# Altium PCB 主板-加霍尔.PcbDoc (part 1 of 4)
Units mm, origin at the board's own origin, x right, y up, seen from the top; angles counter-clockwise.
Board outline 97.69 x 103.45 mm, 2 copper layers (Top Layer, Bottom Layer); 80 components, 81 nets, 260 pads, 281 vias.
Unrouted connection lines stored in the file: 12.
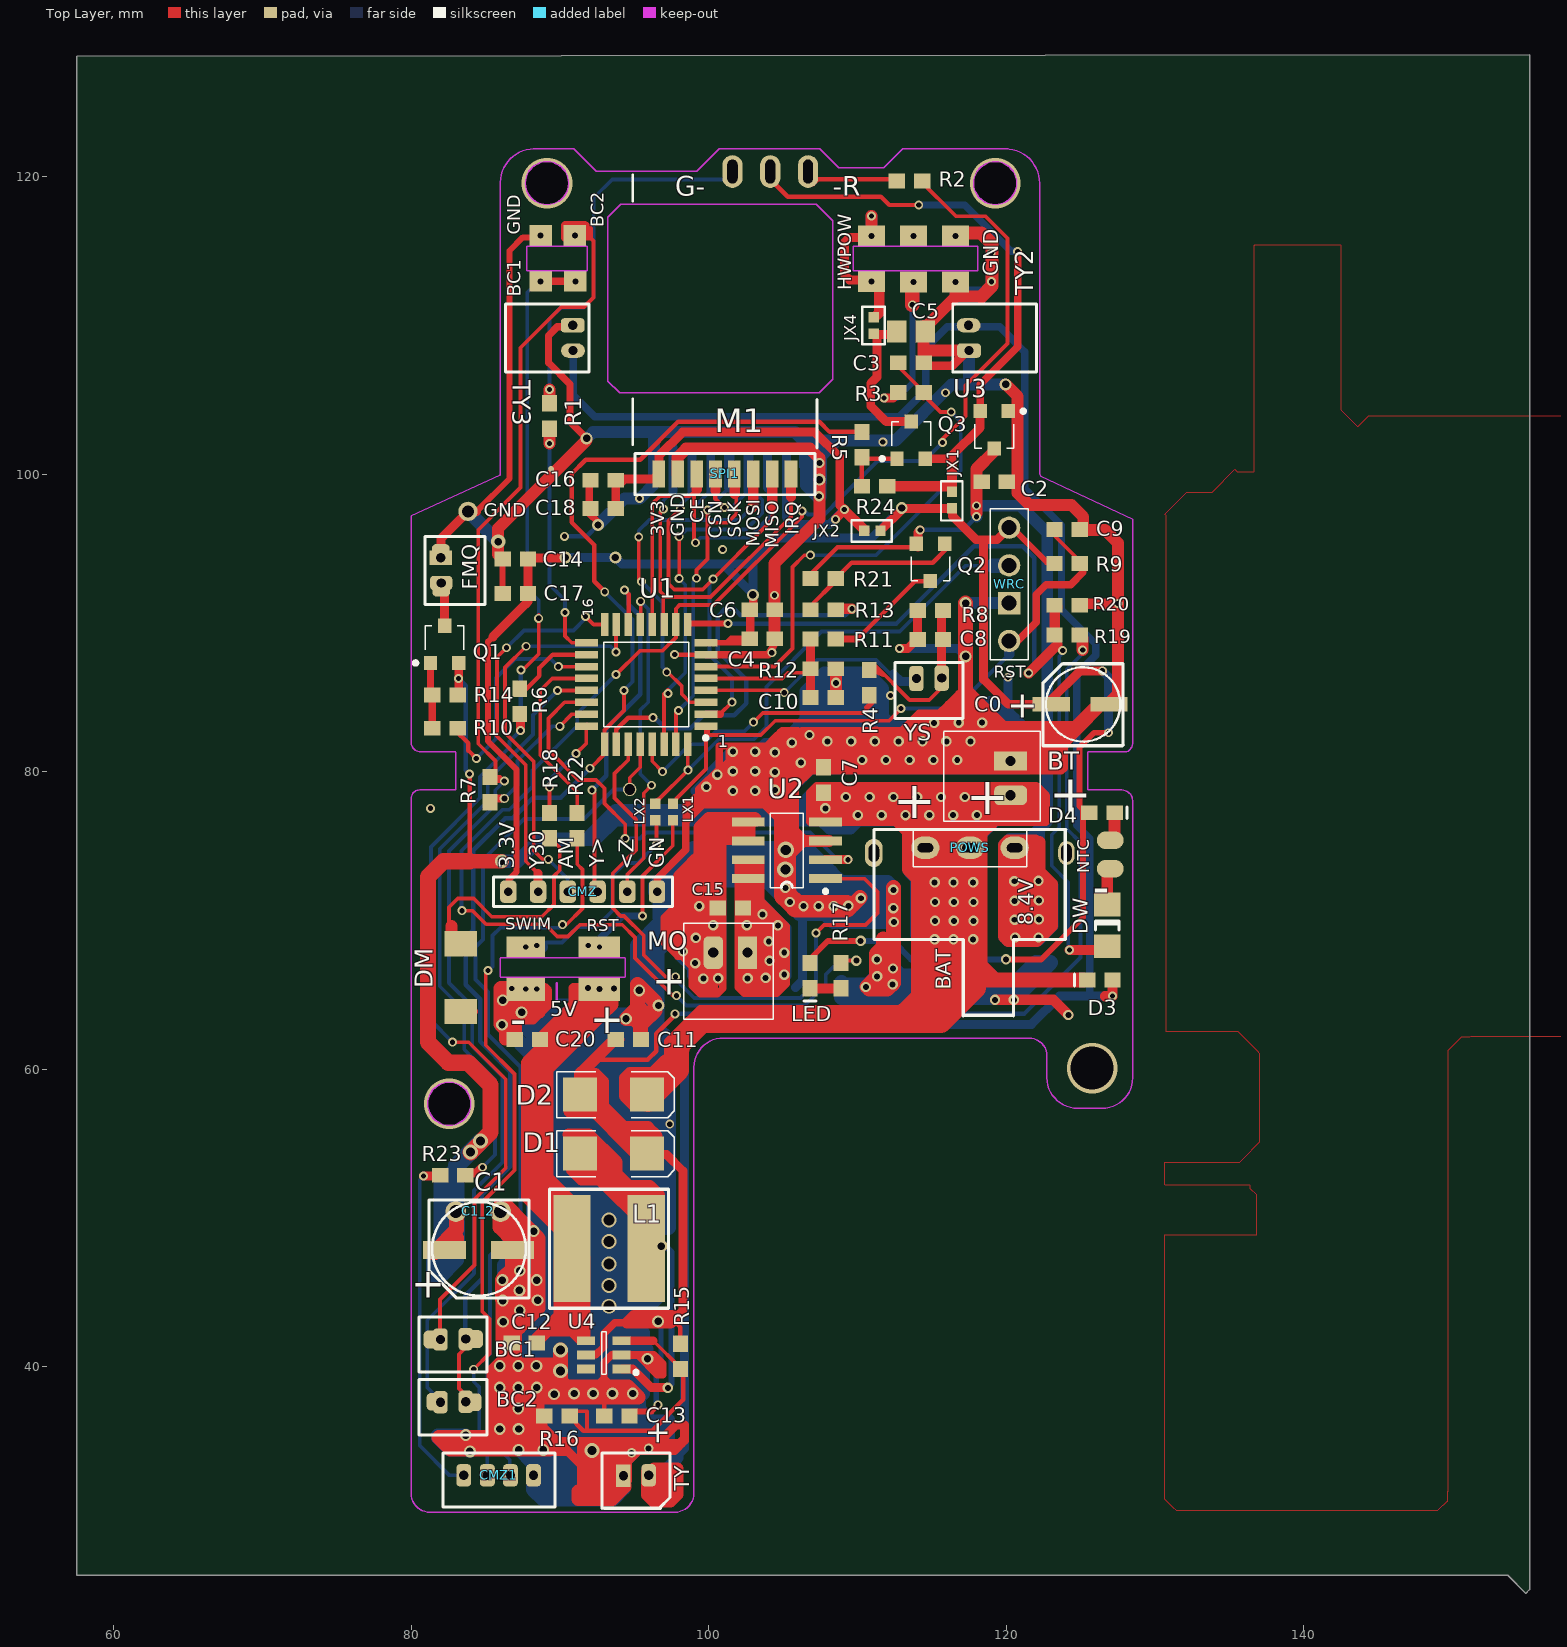
[diagram p0: Top Layer view]
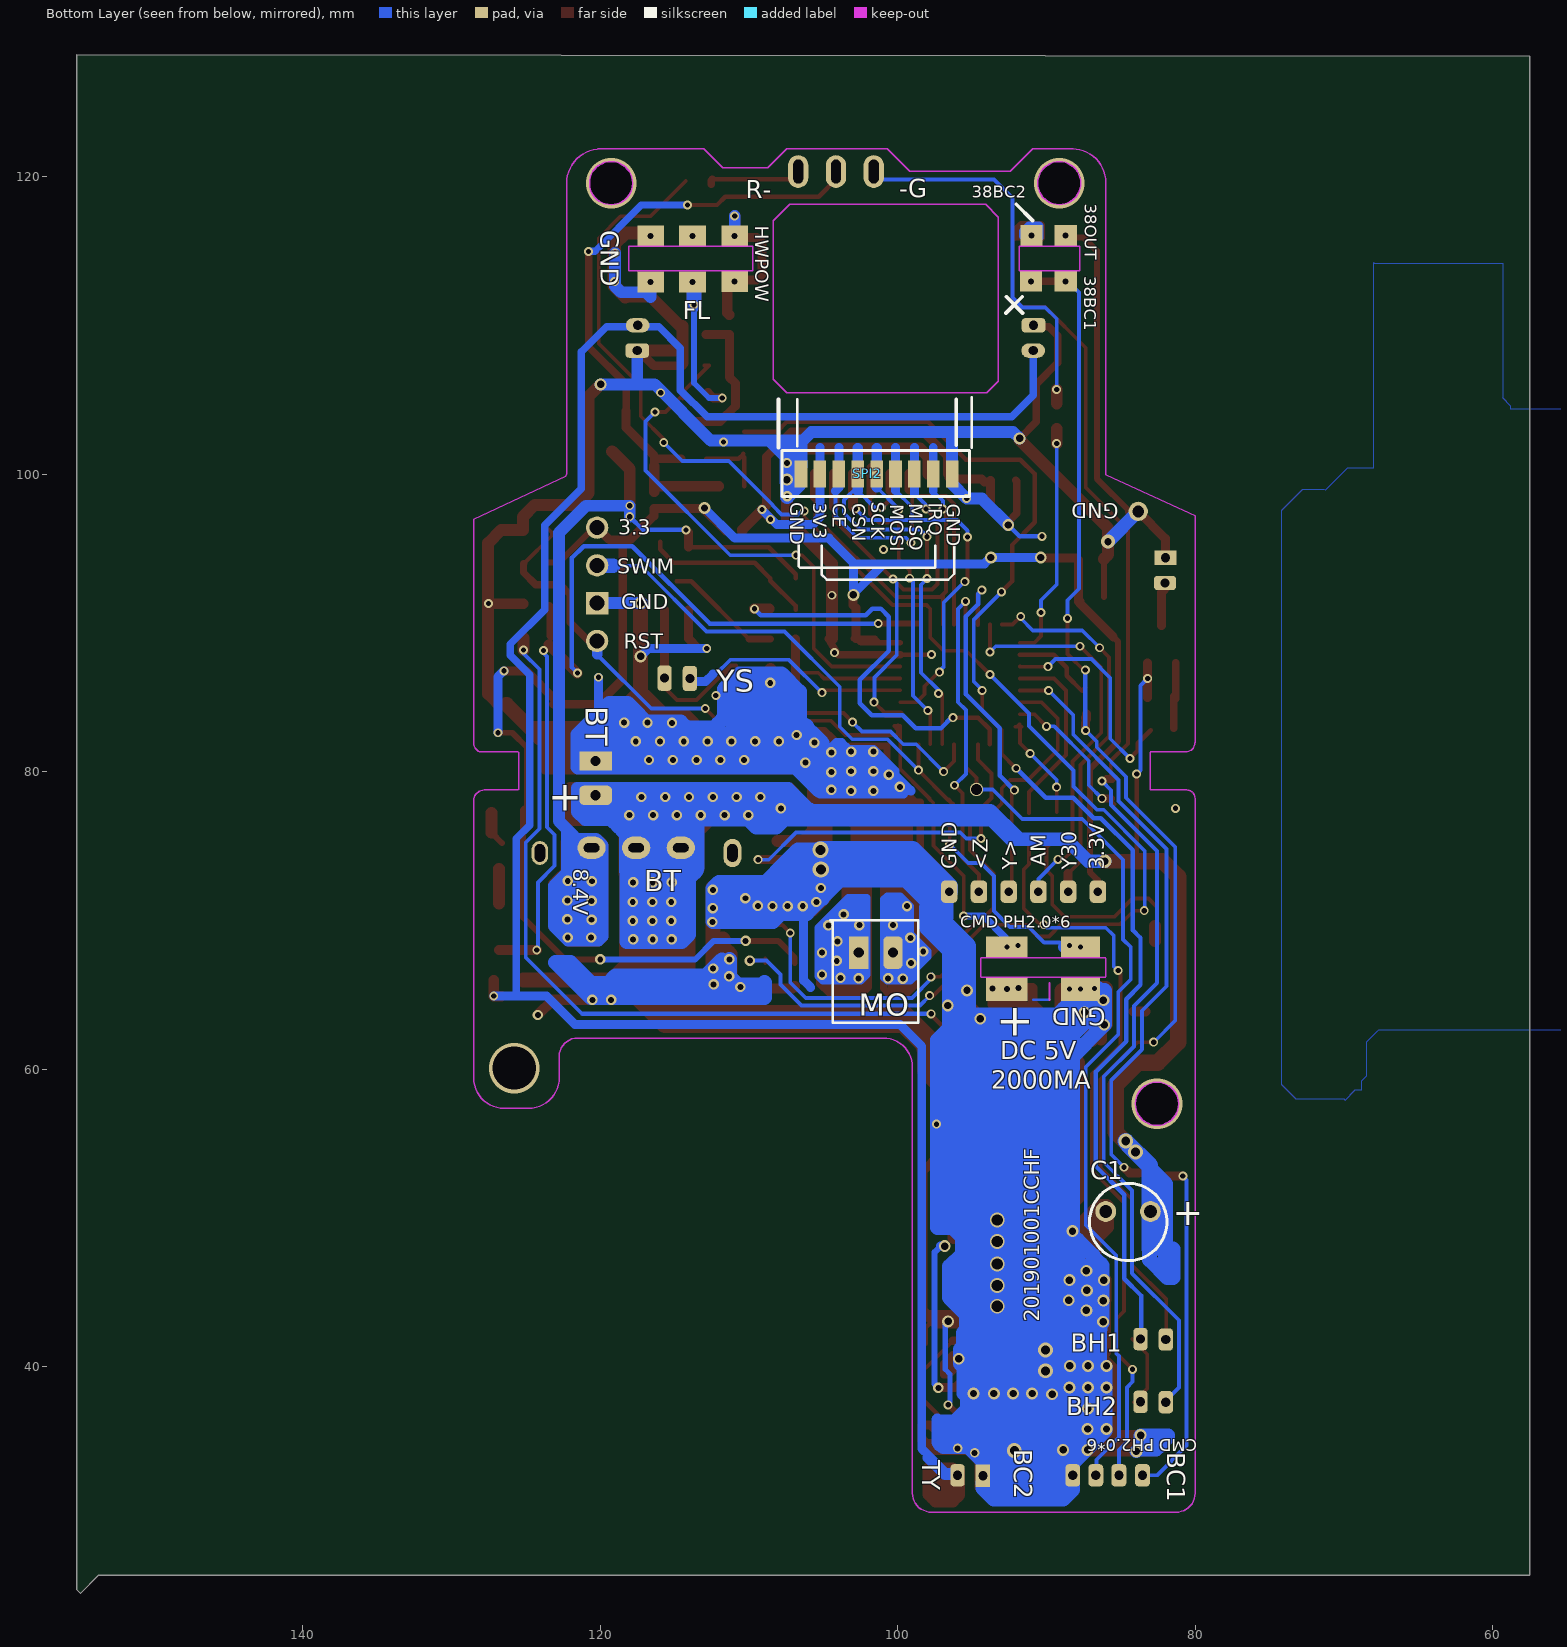
[diagram p1: Bottom Layer view, seen from below]

## Layer stack, top to bottom
Top Layer: signal copper 0.0356
Dielectric: dielectric 0.32, FR-4, Dk 4.8
Bottom Layer: signal copper 0.0356

## Board outline
57.506,128.118 57.506,25.984 153.721,25.984 154.94,24.765 155.194,25.019 155.194,128.219

## Design rules (kind name [scope] priority, off if disabled: settings)
Clearance [All] p1: gap=0.254
PolygonConnect [All] p1: connectstyle=Relief reliefconductorwidth=0.254 reliefentries=4 polygonreliefangle="90 Angle"
RoutingVias [All] p1: holewidth=0.711 width=1.27 viastyle="Through Hole" minholewidth=0.711 minwidth=1.27 maxholewidth=0.711 maxwidth=1.27
SilkscreenOverComponentPads [All] p1: minsilkscreentomaskgap=0.254
SolderMaskExpansion [All] p1: expansion=0.102
Width [All] p1: maxlimit=2 minlimit=0.254 preferedwidth=0.254 minimp=50.000000 maximp=50.000000 favimp=50.000000
27 further rules are at their usual default settings.

## Components (designator, comment, footprint, x,y, rotation, side; value= is the part's Value field where it differs from the comment)
BC1 "1.5*2P" MHDR1X2#1 83.5,41.859 r180 top (schematic designator BT)
BC2 "1.5*2P" MHDR1X2#1 83.5,37.643 r180 top (schematic designator BT)
BT "PH2.0-W" HDR1X2#1 120.3,78.032 r90 top locked
C0 "47uf  5*5.8" CC3216-1206#1 123.7,84.932 r0 top locked
C1 "220UF" CC3216-1206#2 85.3,47.39 r180 top locked
C1_2 "" HDR1X2#2 76.987,51 r180 top locked
C2 "0.1uf" CR1608-0603#1 119.2,99.5 r180 top locked
C3 "0.01uf" CR1608-0603#1 113.6,107.5 r180 top locked
C4 "0.1uf" CR1608-0603#1 103.6,88.951 r0 top locked (schematic designator C6)
C5 "10uf" CR2012-0805 113.6,109.6 r180 top locked (schematic designator C2)
C6 "0.01uf" CR1608-0603#1 103.6,90.9 r180 top locked (schematic designator C7)
C7 "0.1uf" CR1608-0603#1 107.723,79.45 r270 top locked (schematic designator C11)
C8 "100pf" CR1608-0603#1 114.9,88.9 r0 top locked
C9 "0.1uf" CR1608-0603#1 124.1,96.3 r180 top locked
C10 "100pf" CR1608-0603#1 107.7,85 r0 top locked (schematic designator R11)
C11 "10uf" CR1608-0603#1 94.6,62 r0 top locked
C12 "10uf" CR1608-0603#1 87.6,41.6 r180 top locked
C13 "1uf" CR1608-0603#1 93.83,36.7 r180 top locked
C14 "10uf" CR1608-0603#1 87,94.3 r180 top locked (schematic designator R6)
C15 "0.1uf" CR1608-0603#1 101.46,70.85 r0 top locked (schematic designator C4)
C16 "0.1uf" CR1608-0603#1 92.9,99.6 r0 top locked (schematic designator C4)
C17 "10uf" CR1608-0603#1 87,92 r180 top locked (schematic designator R6)
C18 "0.01uf" CR1608-0603#1 92.9,97.7 r0 top locked (schematic designator C4)
C20 "10uf" CR1608-0603#1 87.808,62 r0 top locked
CMZ "CMD PH2.0*6" MHDR1X7#1 94.15,71.944 r180 top locked
CMZ1 "CMD PH2.0*6" MHDR1X7#2 81.5,32.7 r0 top
D1 "SS24" DSO-C2/X2.3 93.6,54.33 r0 top locked
D2 "SS24" DSO-C2/X2.3 93.6,58.3 r0 top locked (schematic designator D3)
D3 "SS14" CC1608-0603 126.3,66 r0 top locked (schematic designator D8)
D4 "SS14" CC1608-0603 126.441,77.25 r180 top locked (schematic designator R4)
DM "3*4*2小龟按钮" HDR1X2#3 85.344,70.032 r90 top locked (schematic designator FW)
DW "WD" CC3216-1206#3 126.8,69.672 r270 top locked
FMQ "1.5*2P" MHDR1X2#2 81.991,94.234 r270 top locked (schematic designator BT)
JX1 "" CR1005-0402 116.357,98.273 r90 top (schematic designator R8)
JX2 "" CR1005-0402 111,96.2 r180 top locked
JX4 "" CR1005-0402 111.1,110 r90 top locked (schematic designator R8)
L1 "22UH" L7 93.3,47.94 r180 top locked
LED "LED-DM" CC1608-0603 106.8,66.3 r90 top locked
LX1 "4.7K" CR1005-0402 97.6,77.292 r90 top locked (schematic designator R8)
LX2 "4.7K" CR1005-0402 96.4,77.292 r90 top locked (schematic designator R8)
MO "PH2.0-W" HDR1X2#4 103,67.843 r180 top locked (schematic designator BT)
POWS "SS12F23" HDR1X3 120.114,74.892 r180 top locked (schematic designator WS)
Q1 "S8550" SO-G3/C2.5 82.245,88.57 r0 top locked (schematic designator Q2)
Q2 "S8550" SO-G3/C2.5 114.91,94.082 r180 top (schematic designator Q1)
Q3 "S8550" SO-G3/C2.5 113.614,102.3 r0 top locked (schematic designator U5)
R1 "1K" CR1608-0603#1 89.3,103.919 r270 top locked
R2 "1K" CR1608-0603#1 113.5,119.732 r0 top
R3 "1K" CR1608-0603#1 113.6,105.5 r180 top locked
R4 "1K" CR1608-0603#1 110.8,86 r270 top locked
R5 "10K" CR1608-0603#1 110.3,102 r90 top (schematic designator R7)
R6 "10K" CR1608-0603#1 87.3,84.734 r270 top locked
R7 "10K" CR1608-0603#1 85.3,78.8 r90 top locked (schematic designator R6)
R8 "1M" CR1608-0603#1 114.9,90.856 r180 top locked
R9 "10K" CR1608-0603#1 124.1,94 r180 top locked
R10 "10K" CR1608-0603#2 82.271,82.931 r0 top locked (schematic designator R7)
R11 "1M" CR1608-0603#1 107.7,88.932 r180 top locked (schematic designator C10)
R12 "500K" CR1608-0603#1 107.7,86.932 r180 top locked
R13 "22K" CR1608-0603#1 107.7,90.9 r0 top locked
R14 "22K" CR1608-0603#2 82.271,85.17 r180 top locked (schematic designator R7)
R15 "100K" CR1608-0603#1 98.1,40.7 r270 top locked
R16 "7.89K" CR1608-0603#1 89.8,36.7 r180 top locked
R17 "1K" CR1608-0603#1 108.9,66.3 r90 top locked (schematic designator R19)
R18 "10K" CR1608-0603#1 89.3,76.38 r90 top locked
R19 "10K" CR1608-0603#1 124.1,89.2 r180 top locked (schematic designator R9)
R20 "4.7K" CR1608-0603#1 124.1,91.2 r180 top locked
R21 "22K" CR1608-0603#1 107.7,93 r0 top locked
R22 "10K" CR1608-0603#1 91.135,76.38 r90 top (schematic designator R2)
R23 "10K" CR1608-0603#1 82.791,52.879 r0 top (schematic designator R2)
R24 "500K" CR1608-0603#1 111.157,99.2 r180 top (schematic designator R7)
SPI1 "SI24R1" MHDR1X8 105.537,100.032 r180 top locked
SPI2 "NRF24RL01" MHDR1X8 97.6,100.032 r0 bottom locked
TY "1.5*2P" MHDR1X2#3 95.8,32.7 r180 top locked (schematic designator BT)
TY2 "1.5*2P" MHDR1X2#4 117.475,109.855 r270 top locked (schematic designator BT)
TY3 "1.5*2P" MHDR1X2#4 90.881,108.483 r90 top locked (schematic designator BT)
U1 "STM8L151K4T6" TQFP32 95.8,85.877 r180 top locked
U2 "MX380（RZ7889D）" SO8 105.254,74.722 r90 top locked
U3 "ME6209-V1RK" SO-G3/C2.5 119.2,103 r180 top locked (schematic designator U5)
U4 "SX1308   B6287K  B6286" SOT23-6_M 92.95,40.8 r180 top locked
WRC "2.54HP" HDR1X4 120.2,88.8 r90 top locked (schematic designator SX)
YS "1.5*2P" MHDR1X2#5 115.5,86.3 r180 top locked (schematic designator BT)

## Footprints (in the part's own frame and the unit in brackets; to place one, negate y for a bottom-side part, rotate by r counter-clockwise, add the part's x,y. Pads: shape width x height; smd on the part's side, far side on the other; paste and mask are expansions set on the pad)
CC1608-0603 [mm]
  rect 1.1x1 smd: 1(-0.85,0) 2(0.85,0)
  silkscreen extent -1.7,-0.4 -1.7,0.4
CC3216-1206#1 [mm]
  rect 2.5x1 smd: 1(-0.662,-0.386) 2(3.213,-0.386)
CC3216-1206#2 [mm]
  rect 2.9x1.2 smd: 1(-1.5,-0.45) 2(3.068,-0.455)
CC3216-1206#3 [mm] "Chip Capacitor;"
  rect 1.6x1.8 smd: 1(-1.4,0) 2(1.4,0)
  silkscreen extent -0.3,-0.8 0.3,0.8
CR1005-0402 [mm]
  rect 0.7x0.7 smd: 1(-0.55,0) 2(0.55,0)
CR1608-0603#1 [mm]
  rect 1.1x1 smd: 1(-0.85,0) 2(0.85,0)
CR1608-0603#2 [mm]
  rect 1.1x1 smd: 1(-0.85,0)
  rect 1.1x1 smd paste+0: 2(0.85,0)
CR2012-0805 [mm] "Chip Resistor; Body 2.0 x 1.3 mm (LxW typ"
  rect 1.3x1.5 smd: 1(-0.95,0) 2(0.95,0)
DSO-C2/X2.3 [mm] "DO-214-AA/SMB; 2 C-Bend Leads; Body 5.3 x 3.6 mm, inc. leads (LxW)"
  rect 2.3x2.3 smd: 1(-2.25,0) 2(2.25,0)
  silkscreen extent -3.8,-1.55 4.1,1.55
HDR1X2#1 [mm]
  rrect50% 1.3x2.2 hole 0.68: 1(0.39,0)
  rect 1.3x2.2 hole 0.68: 2(2.692,0.003)
  silkscreen extent -1.34,-1.99 4.68,4.49
HDR1X2#2 [mm] "Connector; Header; 2 Position"
  round 1.4 hole 0.86: 1(-9.013,0.558) 2(-6.013,0.558)
HDR1X2#3 [mm]
  rect 1.7x2.2 smd: 1(-6.147,2.004) 2(-1.6,2.004)
HDR1X2#4 [mm]
  rect 1.3x2.2 hole 0.68: 1(0.39,0)
  rrect50% 1.3x2.2 hole 0.68: 2(2.692,0.003)
  silkscreen extent -1.34,-1.99 4.68,4.49
HDR1X3 [mm]
  oval 1.9x1.5 hole 0.6 slot 1.05 at 0 deg: 1(-0.46,0) 2(2.54,0) 3(5.54,0)
  silkscreen extent -1.27,-1.27 6.35,1.27
HDR1X4 [mm]
  round 1.5 hole 1: 1(0,0) 3(5.08,0) 4(7.62,0)
  rect 1.5x1.5 hole 1: 2(2.54,0)
  silkscreen extent -1.27,-1.27 8.89,1.27
L7 [mm]
  rect 2.5x7.2 smd: 1(2.5,0) 2(-2.5,0)
  silkscreen extent -4,-4 4,4
MHDR1X2#1 [mm]
  rrect50% 0.96x1.5 hole 0.62: 1(-0.164,0) 2(1.536,0.026)
  silkscreen extent -1.61,-1.49 2.97,2.22
MHDR1X2#2 [mm]
  rect 0.96x1.5 hole 0.62: 1(-0.164,0)
  rrect50% 0.96x1.5 hole 0.62: 2(1.536,0.026)
  silkscreen extent -1.6,-1.07 2.97,2.97
MHDR1X2#3 [mm]
  rrect50% 0.96x1.5 hole 0.62: 1(-0.164,0)
  rect 0.96x1.5 hole 0.62: 2(1.536,0.026)
  silkscreen extent -1.6,-1.52 2.97,2.22
MHDR1X2#4 [mm]
  oval 0.96x1.6 hole 0.62: 1(-0.164,0)
  rrect50% 0.96x1.6 hole 0.62: 2(1.536,0.026)
  silkscreen extent -1.6,-1.07 2.97,4.55
MHDR1X2#5 [mm]
  rrect50% 0.96x1.7 hole 0.62: 1(-0.164,0) 2(1.536,0.026)
  silkscreen extent -1.6,-1.07 2.97,2.72
MHDR1X7#1 [mm] "Connector; Header; 7 Position"
  rrect50% 1.1x1.5 hole 0.58: 2(-2.38,0) 3(-0.38,0) 4(1.62,0) 5(3.62,0) 6(5.62,0) 7(7.62,0)
  silkscreen extent -3.41,-1 8.62,1
MHDR1X7#2 [mm] "Connector; Header; 7 Position"
  rrect50% 1x1.5 hole 0.62: 4(2.03,0) 5(3.62,0) 6(5.17,0) 7(6.72,0)
  silkscreen extent 0.63,-2.14 8.18,1.49
MHDR1X8 [mm] "Connector; Header; 8 Position"
  rect 0.85x1.8 smd: 1(0,0) 2(1.27,0) 3(2.54,0) 4(3.81,0) 5(5.08,0) 6(6.35,0) 7(7.62,0) 8(8.89,0)
  silkscreen extent -1.6,-1.37 10.49,1.4
SO8 [mm]
  rect 0.6x2.2 smd: 1(-1.905,-2.6) 2(-0.635,-2.6) 3(0.635,-2.6) 4(1.905,-2.6) 5(1.905,2.6) 6(0.635,2.6) 7(-0.635,2.6) 8(-1.905,2.6)
  silkscreen extent -2.88,-2.72 2.5,1.1
SO-G3/C2.5 [mm]
  rect 0.9x0.95 smd: 1(-0.95,-1.25) 2(0.95,-1.25) 3(0,1.25)
  silkscreen extent -2.07,-1.37 1.3,1.25
SOT23-6_M [mm]
  rect 1.2x0.59 smd: 1(-1.2,0.95) 2(-1.2,0) 3(-1.2,-0.95) 4(1.2,-0.95) 5(1.2,0) 6(1.2,0.95)
  silkscreen extent -2.29,-1.55 0.15,1.31
TQFP32 [mm] "QFP; 32 Leads; Body 7 x 7 mm; Pitch 0.8 mm"
  rect 1.55x0.5 smd: 1(-4.025,2.8) 2(-4.025,2) 3(-4.025,1.2) 4(-4.025,0.4) 5(-4.025,-0.4) 6(-4.025,-1.2) 7(-4.025,-2) 8(-4.025,-2.8) 18(4.025,-2) 19(4.025,-1.2) 20(4.025,-0.4) 21(4.025,0.4) 22(4.025,1.2) 23(4.025,2) 24(4.025,2.8)
  rect 0.5x1.55 smd: 9(-2.8,-4.025) 10(-2,-4.025) 11(-1.2,-4.025) 12(-0.4,-4.025) 13(0.4,-4.025) 14(1.2,-4.025) 15(2,-4.025) 16(2.8,-4.025) 26(2,4.025) 27(1.2,4.025) 28(0.4,4.025) 29(-0.4,4.025) 30(-1.2,4.025) 31(-2,4.025) 32(-2.8,4.025)
  rect 1.55x0.5 smd mask+0.102: 17(4.025,-2.8)
  rect 0.5x1.55 smd paste+0: 25(2.8,4.025)
  silkscreen extent -4.13,-2.85 2.85,3.72

## Part data
D3: library part "Cap Semi", "Capacitor ("
DW: library part "Cap Semi"
LX2: library part R
U1: library part ST72F324K4T6

## Free pads (board coordinates)
  rrect50% 1.2x1.2 smd: 0(81.432,41.834) 0(81.636,37.643) 0(81.991,94.717) 0(82.017,92.38) 0(84.125,37.617) 0(84.226,41.859)
  rrect50% 1.2x1.2 on Top Solder: 0(82.042,92.405) 0(82.042,94.691) 0(93.802,32.69) 0(96.368,32.69)
  rect 2.6x1.6 hole 0.35: 0(87.7,65.4)
  rect 2.6x1.4 hole 0.35: 0(87.7,68.222)
  rect 1.5x1.4 hole 0.4: 0(88.7,112.98) 0(88.7,116.053) 0(91,116.053) 0(91.032,112.98)
  round 0.4 smd: 0(89.408,100.355)
  rect 2.8x1.6 hole 0.4 mask+0.102: 0(92.65,65.4)
  rect 2.8x1.4 hole 0.35: 0(92.65,68.222)
  round 0.9 hole 0.72: 0(94.691,78.816)
  rect 0.85x1.8 smd far side: 0(96.33,100.032)
  oval 1.36x2.2 hole 0.68 slot 1.6 at 90 deg: 0(101.6,120.36)
  oval 1.36x2.2 hole 0.65 slot 1.6 at 90 deg: 0(104.14,120.36) 0(106.68,120.36)
  rect 1.8x1.4 hole 0.4: 0(110.95,112.956) 0(110.95,116.032) 0(113.78,112.932) 0(113.78,116.032) 0(116.6,112.932) 0(116.6,116.032)
  oval 1.2x1.9 hole 0.7 slot 1.2 at 90 deg: 3(111.103,74.545)
  round 1.3 hole 0.8 paste+0: 4(83.82,97.511)
  oval 1.1x1.6 hole 0.7 slot 1.2 at 90 deg: 4(124.051,74.545)
  oval 1.8x1.2 smd: 4(127,73.482) 4(127,75.4)

## Via types
v1: diameter 0.6, hole 0.35, Top Layer to Bottom Layer, 105 vias
v2: diameter 0.7, hole 0.4, Top Layer to Bottom Layer, 104 vias
v3: diameter 0.8, hole 0.5, Top Layer to Bottom Layer, tented both sides, 30 vias
v4: diameter 0.8, hole 0.5, Top Layer to Bottom Layer, 15 vias
v5: diameter 1, hole 0.6, Top Layer to Bottom Layer, tented both sides, 5 vias
v6: diameter 1, hole 0.75, Top Layer to Bottom Layer, tented both sides, 5 vias
v7: diameter 3.4, hole 2.9, Top Layer to Bottom Layer, 4 vias
v8: diameter 0.65, hole 0.4, Top Layer to Bottom Layer, tented both sides, 2 vias
v9: diameter 0.8, hole 0.35, Top Layer to Bottom Layer, 2 vias
v10: diameter 0.7, hole 0.35, Top Layer to Bottom Layer, 2 vias
v11: diameter 1.1, hole 0.68, Top Layer to Bottom Layer, 2 vias
v12: diameter 0.62, hole 0.4, Top Layer to Bottom Layer, 1 vias
v13: diameter 0.95, hole 0.5, Top Layer to Bottom Layer, 1 vias
v14: diameter 0.9, hole 0.5, Top Layer to Bottom Layer, tented both sides, 1 vias
v15: diameter 0.7, hole 0.4, Top Layer to Bottom Layer, tented bottom, 1 vias
v16: diameter 0.8, hole 0.5, Top Layer to Bottom Layer, tented bottom, 1 vias

## Nets (pads, with @x,y where several pads share a name; then routed paths per layer and width w, separated by ;. In a path a pad name is that pad's centre, name@x,y a point inside that pad or via, vN(x,y) a via of type N, cw(c..) or ccw(c..) an arc to the next point about the centre after c; other vN are vias at no path point)
1D-: D1.1 L1.2 U4.1 | length 44.8
  Top Layer w0.59: U4.1@94.2,39.85 94.897,39.85 96.139,38.608 v15@97.257,38.608
  Top Layer w0.8: 90.576,55.626 91.948,55.626 93.802,53.772 93.802,52.883 ; 93.447,52.603 93.177,52.603 91.669,52.603 ; 93.497,53.823 93.497,52.883 ; 94.259,52.172 94.615,52.172 ; L1.2@95.225,51.537 96.672,51.537 96.037,52.172 94.615,52.172 ; L1.2@95.8,49.98 95.8,49.081 96.23,48.652 L1.2@96.23,49.476 ; 91.669,52.603 91.44,52.603 90.805,53.238 D1.1@91.35,54.33 91.35,52.922 91.669,52.603 ; 91.669,52.603 91.948,52.883 92.897,52.883 93.497,52.883 ; 93.497,52.883 93.802,52.883 ; 93.497,52.883 93.497,52.578 93.802,52.883 ; 93.802,52.883 93.904,52.883 94.615,52.172
  Top Layer w1.5: D1.1@91.35,54.33 91.45,54.33 91.635,54.145 91.991,54.145 92.38,54.534 92.862,54.051 92.862,54.026 91.754,54.026 92.897,52.883 93.177,52.603 L1.2@95.8,49.98
  Bottom Layer w0.4: v3@97.104,48.108 97.511,47.701 97.511,38.837 v15(97.257,38.583)
  Bottom Layer w0.6: v3(96.825,48.108) v3@97.104,48.108
1R-1: R15.2 R16.1 U4.3 | length 18
  Top Layer w0.254: R16.1@90.667,37.008 91.821,37.008 91.821,35.789 ; 96.274,41.75 98.074,39.95 R15.2@98.302,39.95
  Top Layer w0.3: R16.1@90.673,36.606 91.574,35.705 96.208,35.705 98.298,37.795 R15.2@98.298,39.518
  Top Layer w0.5: R16.1@90.673,36.606 R16.1@90.673,36.7
  Top Layer w0.59: U4.3@94.15,41.75 96.274,41.75
3-BH: 
3-WZ: 
3.3V: C0.1 C4.1 C6.2 C14.1 C16.2 C17.1 C18.2 CMZ.7 D4.2 JX1.1 JX1.2 JX2.1 JX2.2 LED.2 pad.0@104.14,120.36 Q3.2 R9.2 R24.1 SPI1.8 SPI2.7 U1.8 U3.2 WRC.4 | length 217.5
  Top Layer w0.254: v1@126.721,82.626 126.873,82.474 v1(126.873,82.626)
  Top Layer w0.3: pad.0@104.14,119.837 105.308,118.669 111.582,118.669 112.141,118.11 v1(114.122,118.11)
  Top Layer w0.4: 85.496,89.078 85.166,88.748 85.166,82.067 87.071,80.162 87.071,73.254 86.53,72.712 CMZ.7@86.53,71.944 ; C17.1@87.642,91.5 87.85,91.292 ; C16.2@93.751,99.593 94.056,99.593 C16.2@94.158,99.492 ; SPI1.8@96.647,99.746 SPI1.8@96.647,100.032 ; U1.8@99.825,88.677 100.711,88.677 ; C4.1@102.667,88.873 102.472,88.677 100.711,88.677 ; C4.1@102.95,88.951 101.518,88.951 101.244,88.677 100.711,88.677 ; LED.2@106.913,67.136 106.913,67.517 108.026,68.631 v2(110.211,68.631) ; v2(119.99,67.386) 122.352,67.386 125.171,70.206 125.171,77.445 124.917,77.699 124.917,81.636 125.908,82.626 v1@126.721,82.626 ; WRC.4@120.42,96.42 122.751,94.089 R9.2@123.539,94.089
  Top Layer w0.5: U3.2@118.25,104.25 118.25,106.055 120.777,108.582 v1(120.777,114.986)
  Top Layer w0.6: 85.496,89.078 87.71,91.292 ; 87.845,91.452 C14.1@87.845,94.252 ; C14.1@87.928,94.386 v4@90.348,94.386 ; v4(93.726,94.412) v4@93.75,94.436 ; C16.2@93.751,99.593 93.751,98.081 C18.2@93.966,97.866 ; C16.2@94.158,99.492 94.361,99.695 96.31,99.695 SPI1.8@96.647,100.032 96.647,101.239 98.252,102.845 107.137,102.845 108.814,101.168 108.814,97.917 v1@109.031,97.7 ; C4.1@102.794,88.949 102.794,91.008 102.997,91.211 v4@102.997,91.897 ; v1@108.521,96.99 v1@109.118,97.587 ; JX2.1@111.55,96.2 113.05,97.7 116.38,97.7 116.38,97.209 117.983,95.606 119.386,95.606 WRC.4@120.2,96.42 ; Q3.2@114.564,101.05 116.357,101.05 ; 116.357,100.574 116.357,101.05 ; U3.2@118.25,104.25 118.25,103.137 116.357,101.244 116.357,101.05 ; 118.339,95.606 118.478,95.466 118.478,86.22 120.153,84.546 C0.1@123.038,84.546 ; C0.1@123.138,84.546 C0.1@123.038,84.546 ; v1(126.467,86.792) 124.968,86.792 123.038,84.862 C0.1@123.038,84.546
  Top Layer w0.7: v1@109.031,97.7 110.449,96.281 JX2.2@110.449,96.2 ; v1@109.118,97.587 v1(109.118,97.638) ; R24.1@112.007,99.2 116.32,99.2 116.357,99.238 ; JX1.2@116.357,98.822 116.357,99.238 ; 116.357,100.553 116.357,99.238
  Top Layer w0.8: pad.0@104.14,119.837 pad.0@104.14,120.36
  Top Layer w1: WRC.4@120.2,96.42 WRC.4@120.42,96.42
  Bottom Layer w0.4: v2(110.211,68.631) 112.37,68.631 113.614,67.386 v2(119.99,67.386)
  Bottom Layer w0.5: v1(114.122,118.11) 117.221,118.11 120.345,114.986 v1(120.777,114.986)
  Bottom Layer w0.6: v4(90.373,94.412) v4(93.726,94.412) 94.158,93.98 102.845,93.98 ; 101.003,93.916 102.997,91.923 v4(102.972,91.897) 102.972,94.056 104.623,95.707 110.947,95.707 v4(112.979,97.739) ; 105.22,101.803 105.22,97.116 105.71,96.626 108.107,96.626 v1(109.118,97.638) ; WRC.4@120.2,96.42 WRC.4@120.2,96.716 ; v1(126.467,86.792) 126.873,86.385 v1(126.873,82.626)
  other v1: 108.534,96.977
3V3: 
5V: C12.1 C20.2 L1.1 pad.0@92.65,65.4 U4.4 | length 98.3
  Top Layer w0.4: U4.4@91.498,41.75 91.318,41.826 U4.4@91.75,41.75
  Top Layer w0.7: C20.2@88.658,62 88.658,62.101 90.925,64.369 90.925,65.456 v2(91.872,65.456) ; L1.1@90.805,45.263 91.059,45.009 91.059,42.189 U4.4@91.389,41.859 ; 90.856,42.393 88.849,42.393 ; 88.849,42.393 89.954,43.497 90.272,43.815 90.272,43.422 C12.1@88.45,41.6 88.45,41.993 88.849,42.393
  Top Layer w0.8: 88.519,52.349 88.519,53.264 ; 88.849,51.664 90.8,49.713 90.8,48.519 L1.1@90.8,47.94 ; 89.954,43.497 89.954,47.094 L1.1@90.8,47.94 ; 90.272,43.815 90.272,45.263 L1.1@90.8,47.94 ; 90.856,42.393 U4.4@91.389,41.859 ; L1.1@91.389,47.351 L1.1@90.8,47.94 ; U4.4@91.65,41.859 L1.1@91.65,47.351 ; 88.519,53.264 88.557,53.302 88.557,56.363 88.519,56.325 88.519,53.264
  Top Layer w1: 87.884,52.781 87.884,51.435 L1.1@90.8,48.519 ; 88.849,51.664 87.884,51.664 87.884,55.499 87.884,60.427 91.948,64.491 pad.0@91.948,64.846 ; 88.925,59.868 89.052,59.995 ; 88.925,60.833 pad.0@92.75,64.658 ; L1.1@90.8,49.713 90.8,50.957 89.052,52.705 89.052,56.363 ; 89.052,56.363 88.557,56.363 88.557,60.008 88.138,60.427 88.621,60.427 89.052,59.995 ; 89.052,56.363 89.052,59.995 ; 89.052,59.995 92.75,63.692 ; 92.75,63.692 93.447,64.389 93.447,64.735 92.75,65.432 pad.0@92.75,64.658 ; 92.75,63.692 pad.0@92.75,64.658
  other v2: 93.624,65.43
8.4V: C2.2 POWS.1 Q2.2 R21.1 U3.3 | length 103.6
  Top Layer w0.3: R21.1@106.85,93 106.85,93.286 108.661,95.098 Q2.2@114.061,95.098
  Top Layer w0.4: v2@122.25,72.746 122.279,72.746 122.452,72.746 122.795,72.746
  Top Layer w0.6: Q2.2@114.061,95.098 114.061,96.103 v1(114.219,96.261)
  Top Layer w0.8: v1@118.008,97.409 118.008,100.358 U3.3@119.2,101.55 ; v2(122.174,72.669) 122.279,72.746 122.453,72.873 122.452,72.746 122.452,72.667 122.441,71.347 122.43,70.077 122.43,68.989 123.088,69.647 123.088,72.452 122.795,72.746 122.25,73.29 122.25,75.286
  Top Layer w1: POWS.1@120.117,74.409 POWS.1@119.939,74.587 ; 120.303,73.822 POWS.1@120.303,74.223 ; POWS.1@121.234,75.108 121.412,75.286 ; 121.945,75.196 121.945,75.286 121.412,75.286 ; v2@122.25,68.936 122.047,68.732 120.167,68.732 119.939,68.961 POWS.1@119.939,74.587 ; POWS.1@119.939,74.587 119.939,75.057 120.167,75.286 121.412,75.286
  Bottom Layer w0.3: v1(114.219,96.261) 117.114,96.261 v1(118.008,97.155)
  Bottom Layer w0.8: v1(118.008,97.155) v1(118.008,97.892) 120.946,97.892 122.762,96.076 122.762,76.686 121.828,75.753 ; v2(120.574,71.323) 120.675,71.323 122.009,72.657 v2@122.174,72.657 ; 122.098,76.022 122.098,75.483 ; v2(122.174,72.669) v2@122.174,72.657 ; 122.225,73.203 122.225,76.149 ; 122.098,75.483 122.098,73.355 122.796,72.657 ; 122.098,75.483 120.263,75.483 119.837,75.057 119.837,68.936 120.117,68.656 122.149,68.656 123.114,69.621 123.114,72.339 122.796,72.657 ; v2@122.174,72.657 122.796,72.657 ; v2@122.174,72.657 122.174,69.317 122.796,69.939 122.796,72.657
  Bottom Layer w1: POWS.1@120.091,74.409 POWS.1@120.574,74.892 ; POWS.1@121.082,75.235 POWS.1@121.209,75.108 ; POWS.1@121.412,75.108 121.564,75.26 ; 121.92,73.177 121.92,75.286
  other v2: 120.599,68.859 122.174,68.859 120.574,70.053 122.199,70.079 122.199,71.349 120.548,72.644
8V: 
38BC1: BC1.2 pad.0@81.432,41.834 pad.0@88.7,112.98 pad.0@91.032,112.98 R6.1 R6.2 U1.18 | length 88.8
  Top Layer w0.254: pad.0@81.928,41.833 81.928,44.514 84.261,46.847 84.261,51.266 86.36,53.365 86.36,59.334 83.871,61.824 v1(82.779,61.824) ; R6.1@87.376,85.658 R6.1@87.45,85.584 ; v1@87.376,86.731 88.57,87.925 v1@88.57,90.551
  Top Layer w0.3: R6.1@87.376,85.658 87.597,85.438 88.621,86.462 88.621,86.995 89.503,87.877 U1.18@91.775,87.877
  Top Layer w0.5: pad.0@88.7,112.98 pad.0@91.032,112.98
  Top Layer w0.6: R6.2@87.3,83.884 87.3,83.554 R6.2@87.351,83.605 ; v1(87.351,82.779) 87.351,83.287
  Bottom Layer w0.254: v1(82.779,61.824) 81.331,63.271 81.331,74.955 84.633,78.257 84.633,79.669 86.614,81.65 86.614,82.042 v1(87.351,82.779) ; v1(88.57,90.322) 88.57,91.542 87.808,92.304 87.808,112.218 pad.0@88.57,112.98
  Bottom Layer w0.3: v1(87.351,82.779) 87.376,82.804 v1(87.376,86.843)
38BC2: BC2.2 pad.0@81.636,37.643 pad.0@91,116.053 R7.1 R7.2 U1.23 | length 108.1
  Top Layer w0.254: R7.2@85.3,79.609 85.534,79.375 v1@86.004,79.375 ; R7.2@85.3,79.65 85.983,79.65 v1(86.258,79.375) v1@86.004,79.375 ; R7.1@85.395,77.814 R7.1@85.661,78.08 ; R7.2@85.674,79.705 85.674,80.721 84.502,81.894 84.502,96.262 87.351,99.111 87.351,108.509 90.094,111.252 91.618,111.252 92.256,111.89 92.256,115.694 91.923,116.027 ; 85.827,79.527 85.852,79.527 v1@86.004,79.375 ; v1(89.992,83.058) 90.812,83.878 U1.23@91.775,83.878
  Top Layer w0.56: R7.1@85.661,78.207 v12(86.258,78.207)
  Top Layer w0.6: pad.0@90.373,115.937 90.373,116.738 91.669,116.738 91.923,116.484 91.923,116.027 91.211,116.027 91.121,115.937 pad.0@90.373,115.937
  Bottom Layer w0.254: BC2.2@82.064,37.617 81.077,38.604 81.077,43.129 84.229,46.281 84.229,51.844 86.134,53.749 86.134,59.51 84.102,61.542 84.102,64.26 82.55,65.811 82.55,74.676 85.649,77.775 85.649,78.765 v1(86.258,79.375) ; v12(86.258,78.207) 87.147,79.096 87.147,80.747 89.459,83.058 v1(89.992,83.058)
  Bottom Layer w0.6: pad.0@90.765,115.937 90.5,115.937 90.5,116.713 91.161,116.713 91.542,116.332 91.542,116.027 pad.0@90.958,116.027
38OUT-1: 
38OUT-2: 
84-D: 
84ADC: Q2.3 R11.1 | length 7.9
  Top Layer w0.3: 109.988,88.932 113.868,92.812 Q2.3@114.864,92.812
  Top Layer w0.5: R11.1@108.55,88.932 109.988,88.932
<Z: CMZ.3 U1.13 | length 22.9
  Top Layer w0.254: CMZ.3@94.53,71.944 94.53,73.092 95.631,74.193 95.631,78.562 v1(96.164,79.096) ; U1.13@95.4,89.586 95.423,89.563 95.428,89.563 v1(95.428,91.465)
  Bottom Layer w0.254: v1(95.428,91.465) 95.936,90.957 95.936,84.684 95.4,84.148 95.4,79.86 v1(96.164,79.096)
AM: CMZ.5 U1.15 | length 26.9
  Top Layer w0.254: v1(87.732,88.443) 86.309,87.02 86.309,82.626 88.24,80.696 88.24,74.701 88.824,74.117 v1(89.218,74.117) ; v1(93.777,88.062) U1.15@93.777,89.902
  Bottom Layer w0.254: v1@87.986,88.443 93.396,88.443 v1(93.777,88.062) ; v1(89.218,74.117) 90.53,72.805 CMZ.5@90.53,71.944
AM-D: 
BCG: BC1.1 BC2.1 pad.0@84.125,37.617 pad.0@84.226,41.859 R5.2 U1.25 | length 94.6
  Top Layer w0.254: pad.0@84.125,37.617 83.21,38.532 83.21,40.843 pad.0@84.226,41.859 ; v1@92.1,80.289 93,81.189 U1.25@93,81.853 93,82.815 94.31,84.125 v1(94.31,85.471)
  Top Layer w0.3: v1(93.015,92.1) 92.304,92.812 92.304,95.25 90.78,96.774 90.78,100.025 91.745,100.99 95.402,100.99 97.961,103.549 107.429,103.549 108.127,102.85 R5.2@110.3,102.85
  Bottom Layer w0.254: v1(93.015,92.1) 94.871,90.244 94.871,86.058 v1@94.297,85.484
  Bottom Layer w0.3: BC1.1@83.628,41.859 83.628,44.792 84.76,45.923 84.76,51.562 86.665,53.467 86.665,59.842 84.633,61.874 84.633,64.719 83.668,65.684 83.668,68.834 84.176,69.342 84.176,74.727 86.335,76.886 86.817,76.886 88.189,78.257 90.043,78.257 v1(92.024,80.239)
BH1: CMZ1.5 R22.1 R22.2 U1.20 | length 63.1
  Top Layer w0.254: v1(84.201,39.827) 85.268,40.894 85.268,43.231 84.769,43.73 84.769,51.038 86.944,53.213 86.944,59.69 85.014,61.62 85.014,66.446 v1@85.166,66.599 ; v1(90.17,69.723) 90.424,69.723 91.516,70.815 91.516,73.431 91.161,73.787 R22.1@91.161,75.53 ; R22.2@91.161,77.23 91.161,78.638 88.671,81.128 88.671,85.471 89.478,86.278 U1.20@91.775,86.278
  Bottom Layer w0.254: v1(84.201,39.827) 84.201,38.989 84.582,38.608 84.582,34.95 85.115,34.417 CMZ1.5@85.115,33.223 ; v1@85.166,66.599 85.471,66.904 85.471,68.986 86.004,69.52 89.967,69.52 v1(90.17,69.723)
  other v1: 85.166,66.65
BH2: CMZ1.4 R23.1 R23.2 U1.21 | length 63.8
  Top Layer w0.254: R23.1@81.894,52.832 R23.1@81.941,52.879 ; R23.2@83.641,52.879 R23.2@83.798,53.035 ; v1(89.84,85.471) 91.769,85.471 U1.21@91.775,85.478
  Top Layer w0.6: v1(80.823,52.832) R23.1@81.894,52.832 ; R23.2@83.798,53.035 84.404,53.035 v1(84.785,53.416)
  Bottom Layer w0.254: v1(80.823,52.832) 80.569,52.578 80.569,34.696 82.565,32.7 CMZ1.4@83.62,32.7 ; v1(84.785,53.416) 85.626,54.257 85.626,59.281 83.566,61.341 83.566,63.932 81.915,65.583 81.915,74.803 85.141,78.029 85.141,79.458 88.189,82.506 88.189,83.82 v1(89.84,85.471)
BI-R: U1.22 U2.2 | length 31.3
  Top Layer w0.254: U1.22@91.775,84.678 90.316,84.678 89.23,83.591 89.23,81.458 91.237,79.451 92.428,79.451 92.989,78.89 92.989,77.876 94.386,76.479 v1(94.386,75.514)
  Top Layer w0.6: U2.2@107.854,74.092 v1(109.372,74.092)
  Bottom Layer w0.254: v1(94.386,75.514) 95.377,75.514 95.783,75.921 106.832,75.921 108.661,74.092 v1(109.372,74.092)
BT: BT.1 C1.2 C1_2.2 C7.2 D2.2 D3.1 POWS.2 POWS.3 Q1.2 R14.1 U2.4 | length 382.9
  Top Layer w0.3: 83.922,73.99 v1(83.922,79.858)
  Top Layer w0.5: 97.231,60.325 97.231,61.874 97.536,62.179 ; 97.587,59.233 97.587,59.782 ; 97.866,61.29 97.796,61.525 97.536,61.785 97.536,62.179 ; 98.273,61.849 98.273,62.916 ; 98.641,63.284 98.958,63.602 ; 100.416,63.144 100.873,63.602 98.958,63.602 ; 114.605,63.602 115.138,64.135 114.351,64.922 114.097,64.668 113.5,64.072 99.428,64.072 98.958,63.602 ; 97.536,62.179 98.273,62.916 ; 98.273,62.916 98.958,63.602
  Top Layer w0.6: R14.1@83.195,84.988 Q1.2@83.195,87.32 ; U2.4@106.858,76.657 106.858,78.588 107.29,79.019 122.022,79.019 122.657,78.384 122.657,76.657 119.024,76.657 115.164,76.657 113.005,76.657 U2.4@106.858,76.657
  Top Layer w0.8: D2.2@94.945,57.607 94.361,58.191 94.361,59.411 94.717,59.766 96.19,59.766
  Top Layer w1: C1.2@81.509,47.676 C1.2@81.61,47.676 ; C1.2@83.05,47.854 83.05,48.663 C1.2@82.232,47.845 81.678,47.845 83.05,49.217 C1_2.2@83.05,50.442 ; 83.922,73.99 v14(86.081,73.99) ; 113.487,76.175 113.487,73.457 114.351,72.593 ; v2@114.859,72.517 115.672,72.517 ; v2@114.884,69.926 115.697,69.926 ; v2@114.884,71.196 115.697,71.196 ; v2@115.164,72.644 117.373,72.644 ; 115.282,66.158 115.44,66 124.395,66 ; 115.672,67.462 117.881,67.462 ; 115.672,68.732 v2(116.459,68.732) v2(117.78,68.732) v2@117.881,68.732 ; 115.672,72.568 v2(116.459,72.568) v2(117.78,72.568) v2@117.881,72.568 ; 115.697,69.977 v2(116.484,69.977) v2(117.805,69.977) v2@117.907,69.977 ; 115.697,71.247 v2(116.484,71.247) v2(117.805,71.247) v2@117.907,71.247 ; 117.373,72.593 v2@117.615,72.834 ; 119.024,76.657 118.262,75.895 118.262,73.152 118.237,73.127 ; D3.1@125.15,66 124.395,66 ; v2@117.615,72.834 118.237,73.457 118.237,73.127 ; v2@117.615,72.834 117.945,72.834 118.237,73.127 ; 118.237,73.127 118.237,66.98 119.217,66 124.395,66
  Top Layer w1.1: 83.922,73.99 82.169,73.99 81.128,72.949 81.128,61.824 82.499,60.452 83.82,60.452 85.327,58.945 85.327,55.761 v5(83.998,54.432)
  Top Layer w1.2: 112.166,77.292 112.37,77.292 113.005,76.657 POWS.3@114.174,75.488 ; 115.164,77.724 117.932,77.724
  Top Layer w1.4: D2.2@95.85,58.166 D2.2@95.91,58.166 ; D2.2@95.91,57.836 D2.2@95.91,58.166 ; 97.231,60.325 95.91,59.004 D2.2@95.91,58.166 ; 97.866,61.29 98.044,61.468 ; 97.993,61.087 97.993,59.944 96.063,58.014 D2.2@95.91,58.166 ; 98.273,61.849 99.568,63.144 100.416,63.144 112.573,63.144 ; 114.097,64.668 112.573,63.144 ; 117.932,77.724 117.932,65.456 115.621,63.144 112.573,63.144
  Top Layer w1.5: 114.351,64.922 114.351,72.593 ; v2@115.164,72.593 115.164,72.644 115.164,76.657 115.164,77.724 ; 120.345,77.216 120.345,77.572
  Bottom Layer w0.3: v1(83.185,86.284) 83.668,85.801 83.668,80.112 v1(83.922,79.858)
  Bottom Layer w0.8: 105.693,77.27 105.896,77.473 107.34,78.918 117.132,78.918 ; 106.161,77.739 cw(c107.595,76.305) 107.595,78.333 ; 106.829,77.473 107.224,77.079 107.544,76.759 108.128,76.175 109.525,76.175 110.058,76.708 ; v2@110.338,76.987 110.058,76.708 ; 118.389,76.683 118.389,76.708 ; 121.219,77.079 120.828,77.079 119.771,77.079 118.785,77.079 118.415,77.079 ; 110.058,76.708 113.995,76.708 118.389,76.708 ; 110.058,76.708 108.102,76.708 108.052,76.759 107.732,77.079 113.995,77.079 118.389,77.079 118.415,77.079 ; 117.132,78.918 118.415,77.635 118.415,77.079 ; 117.132,78.918 121.552,78.918 121.552,77.297 121.026,76.771 120.752,76.771 120.735,76.755 118.462,76.755 118.436,76.755 118.415,76.733 ; 118.389,76.708 118.415,76.708 118.415,76.733 ; 118.389,76.708 118.415,76.733 ; 118.415,76.733 118.415,77.079
  Bottom Layer w0.9: v14(86.081,73.99) 87.173,73.99 88.646,75.463 92.38,75.463 93.675,76.759 107.544,76.759 108.052,76.759 108.636,76.759 ; 91.973,75.616 93.759,77.401 105.824,77.401 105.896,77.473 106.829,77.473 ; 107.224,77.079 107.732,77.079
  Bottom Layer w1: 81.483,47.93 81.483,45.999 81.864,45.999 83.05,47.185 83.05,48.336 ; 81.991,46.863 81.991,52.299 82.855,53.162 ; 82.067,48.484 ccw(c82.871,48.484) 82.303,47.916 ; 114.376,73.685 117.678,73.685 ; 114.935,72.314 114.935,68.758 114.351,68.758 114.046,69.063 ; 117.348,73 114.046,73 114.046,69.063 ; 118.389,76.683 118.212,76.505 118.212,68.578 114.531,68.578 114.046,69.063 ; 118.389,76.708 118.389,77.079 118.389,77.14
  Bottom Layer w1.1: 83.033,49.727 83.033,53.467 ; 83.05,47.898 83.05,49.727 ; v5@84.506,54.94 83.033,53.467 ; v5(84.658,55.169) 83.033,53.543 83.033,53.467
  Bottom Layer w1.3: 118.608,78.537 118.461,78.389 119.278,77.572 119.771,77.079 ; 120.828,77.079 120.828,77.47
  Bottom Layer w2: 113.995,77.114 113.995,77.079 113.995,76.708 113.995,73.609 114.605,73 ; 117.348,73 117.729,73.381 117.729,76.022 118.212,76.505 ; 118.389,76.683 118.415,76.708 118.462,76.755 118.785,77.079 119.278,77.572 BT.1@119.99,78.283
  other v2: 115.189,68.732 115.214,69.977 115.214,71.247 115.189,72.568 110.033,77.089 111.633,77.089 113.233,77.089 114.833,77.089 116.433,77.089 118.033,77.089 107.848,77.546 109.221,78.308 110.821,78.308 112.421,78.308 114.021,78.308 115.621,78.308 117.221,78.308
BTJC: 
C-84: C11.1 C13.1 D1.2 D2.1 R15.1 R19.1 U4.5 | length 119.3
  Top Layer w0.3: D2.1@91.35,58.887 91.599,59.136 91.77,58.965 91.77,59.688 91.77,60.108 91.77,60.223 92.202,60.655 92.317,60.655 95.91,60.655 96.469,61.214 96.469,62.382 v1@97.79,63.703 ; 97.104,43.18 97.561,43.18 ; R15.1@98.1,41.55 98.1,42.641 97.561,43.18 ; 97.134,42.887 cw(c97.561,42.722) 97.561,43.18 ; 97.134,42.887 cw(c97.561,42.722) 97.561,43.18 ; 97.134,42.887 cw(c97.561,42.722) 97.561,43.18
  Top Layer w0.4: C13.1@94.68,36.8 94.88,37 96.157,37 v1(96.596,37.44)
  Top Layer w0.5: D2.1@91.35,58.166 D2.1@91.77,58.166 ; U4.5@91.75,40.8 92.413,40.8 92.939,41.326 92.939,42.215 93.685,42.961 94.513,42.961
  Top Layer w0.6: D1.2@95.656,54.28 97.155,54.28 98.273,53.162 98.273,43.805 97.428,42.961
  Top Layer w0.8: D2.1@90.653,57.175 92.685,57.175 ; D2.1@91.35,58.166 91.35,58.887 91.35,59.688 ; 92.888,57.15 92.888,59.182 92.382,59.688 91.77,59.688 91.35,59.688 ; C11.1@93.95,62 C11.1@93.75,62 93.662,62 92.317,60.655 91.77,60.108 91.35,59.688 ; 93.955,56.109 95.91,56.109 96.495,55.524 95.275,55.524 ; v4@96.749,43.155 96.749,43.129 96.901,42.977 97.444,42.977 97.896,43.429 94.982,43.429 94.513,42.961 97.428,42.961 ; v1(125.146,88.189) R19.1@125.146,89
  Top Layer w1.5: D2.1@91.77,58.166 D1.2@95.656,54.28
  Bottom Layer w0.254: 121.202,63.721 124.993,67.513 124.993,75.257 124.079,76.171 124.079,86.893 v1@125.146,87.96
  Bottom Layer w0.3: v1@97.79,63.721 121.202,63.721
  Bottom Layer w0.35: v1@96.622,37.49 96.469,37.643 96.469,39.497 96.799,39.827 96.799,42.85 v4@96.634,43.015
  other v1: 97.739,63.729
  other v4: 96.596,43.053
CE: SPI1.6 SPI2.6 U1.12 | length 26.3
  Top Layer w0.254: U1.12@96.2,89.902 96.2,98.003 96.749,98.552 98.73,98.552 99.009,98.831 99.009,95.631 v1@99.238,95.402
  Top Layer w0.7: 99.187,99.009 SPI1.6@99.187,100.032
  Bottom Layer w0.254: v1(99.111,95.402) 99.441,95.733 102.692,95.733 104.165,97.206 104.165,98.882
  Bottom Layer w0.6: 103.95,101.803 103.95,99.098 104.165,98.882
CKTS: CMZ1.6 pad.0@94.691,78.816 U1.28 | length 59.3
  Top Layer w0.254: pad.0@94.691,78.816 94.691,79.604 95.4,80.312 U1.28@95.4,81.599
  Bottom Layer w0.254: CMZ1.6@86.62,32.7 86.62,33.75 85.115,35.255 85.115,40.716 85.293,40.894 85.293,47.473 87.351,49.53 87.351,60.147 85.166,62.332 85.166,65.202 84.328,66.04 84.328,68.224 84.836,68.732 84.836,74.092 87.579,76.835 91.618,76.835 93.599,78.816 pad.0@94.691,78.816
CMD2: 
CSN: SPI1.5 SPI2.5 U1.30 | length 30.9
  Top Layer w0.254: U1.30@97,81.853 97,85.24 v1@97.257,85.496 ; v1@98.019,92.939 v1(98.019,95.809)
  Top Layer w0.3: 100.457,98.933 100.457,98.349 v1@101.054,97.752
  Top Layer w0.7: 100.457,98.933 SPI1.5@100.457,100.032
  Bottom Layer w0.254: v1(97.257,85.268) 97.257,85.496 98.425,86.665 98.425,92.583 v1(98.019,92.989) ; v1(98.019,95.809) 98.501,96.291 102.514,96.291 103.607,97.384 103.607,98.274 SPI2.5@102.68,99.2 ; v1(101.067,97.765) 101.549,97.765 102.68,98.895
  Bottom Layer w0.7: 102.68,98.895 102.68,101.752
DCJC: R13.2 U1.26 | length 28.4
  Top Layer w0.3: U1.26@93.8,81.853 93.8,82.853 94.59,83.642 v1(96.266,83.642) ; R13.2@108.55,90.9 R13.2@108.607,90.957
  Top Layer w0.7: R13.2@108.607,90.957 v1(109.626,90.957)
  Bottom Layer w0.3: v1@96.317,83.693 97.079,82.931 98.781,82.931 99.644,83.795 101.727,83.795 102.54,84.607 102.54,86.182 100.596,88.126 100.596,90.436 101.117,90.957 101.702,90.957 102.138,90.521 109.19,90.521 v1(109.626,90.957)
DM: R18.2 U1.24 | length 7.4
  Top Layer w0.254: R18.2@89.3,77.304 v1(89.3,78.969) ; v1(91.084,81.229) 91.775,81.92 U1.24@91.775,83.078 ; U1.24@91.669,83.033 U1.24@92.075,83.033 ; U1.24@91.804,83.202 U1.24@91.973,83.033
  Bottom Layer w0.254: v1(89.3,78.969) 89.3,79.445 v1(91.084,81.229)
DMD: DM.2 R18.1 | length 15.6
  Top Layer w0.254: 82.702,69.469 82.55,69.621 82.55,70.891 83.134,71.476 84.201,71.476 85.42,70.256 88.773,70.256 89.599,71.082 89.599,72.987 89.992,73.381 89.992,74.912 R18.1@89.3,75.604
  Top Layer w0.8: DM.2@82.702,68.61 82.702,69.647
DMLED: 
DW: D4.1 pad.4@127,75.4 | length 2.3
  Top Layer w0.4: pad.4@126.6,75.209 pad.4@127.291,75.901
  Top Layer w0.8: pad.4@127.291,75.901 D4.1@127.291,77.25
DW+: DW.1 pad.4@127,73.482 | length 2.3
  Top Layer w0.8: DW.1@126.8,71.148 pad.4@126.8,73.482